# Altium PCB PCB8.PcbDoc
Units mil, origin at the board's own origin, x right, y up, seen from the top; angles counter-clockwise.
Board outline 6000 x 4000 mil, 2 copper layers (Top Layer, Bottom Layer); 13 components, 16 nets, 86 pads, 11 vias.
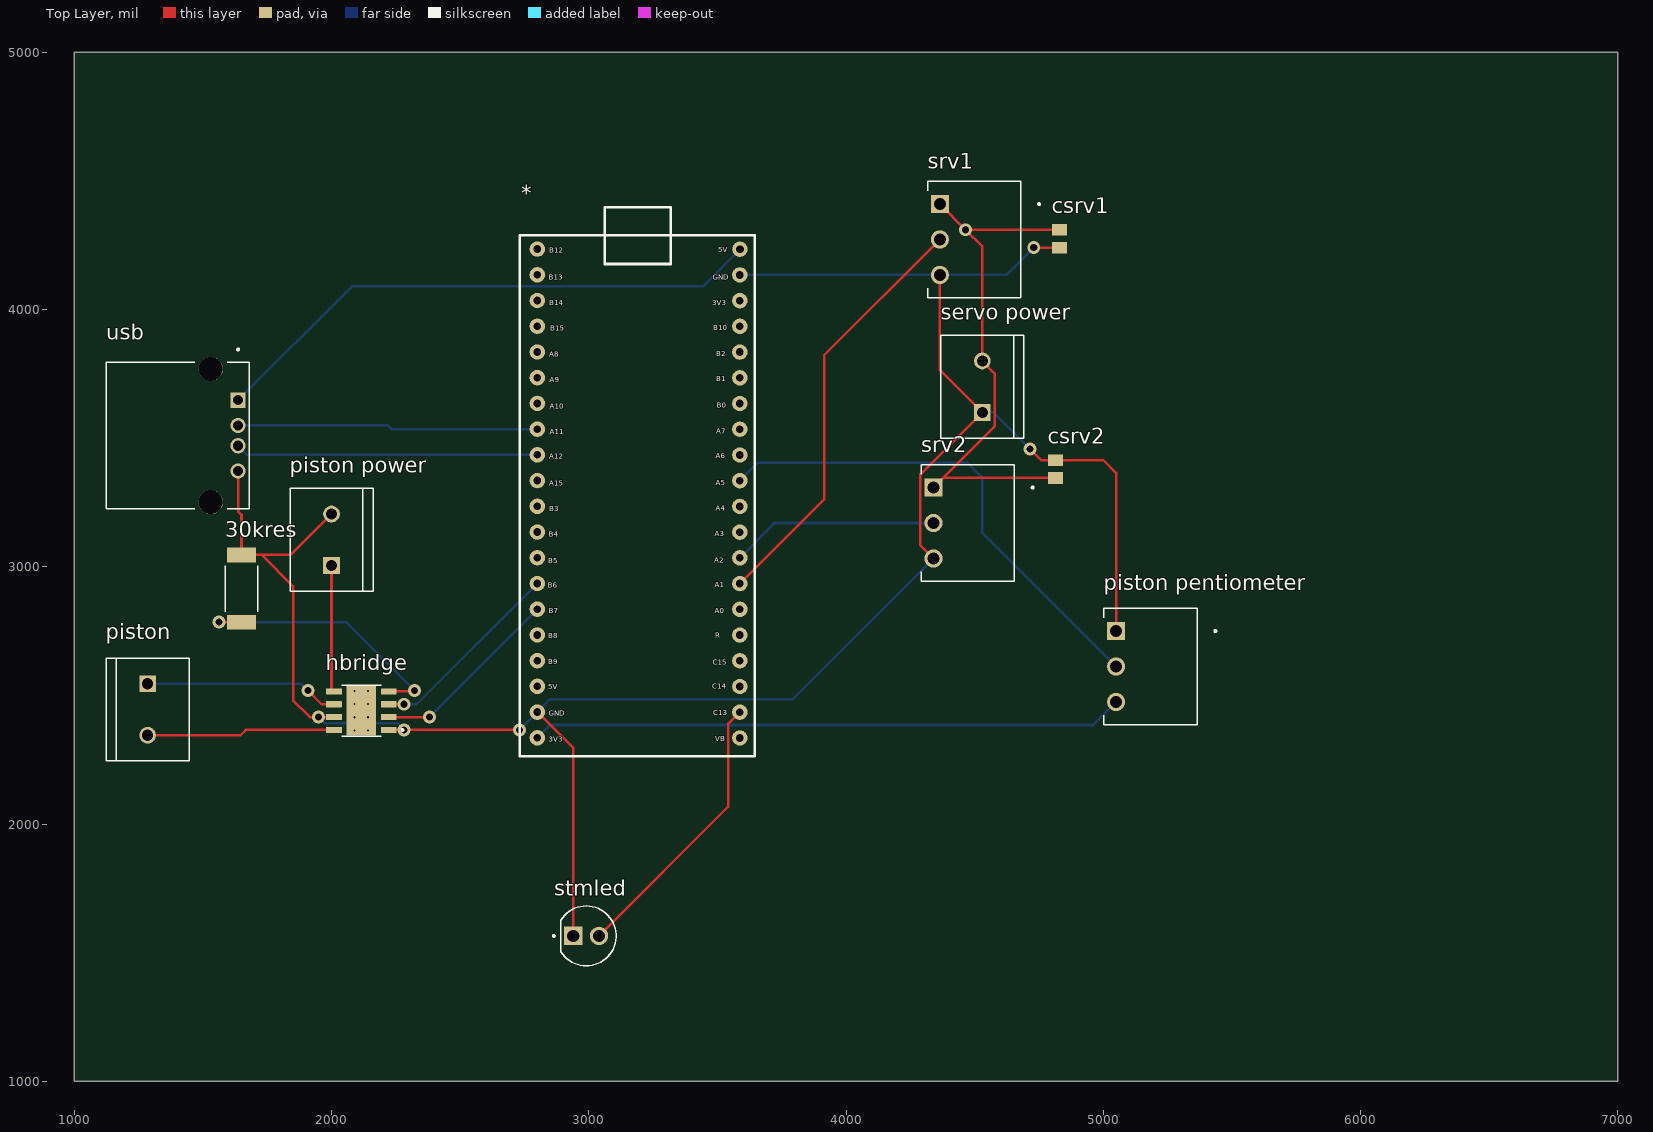
[diagram p0: Top Layer view]
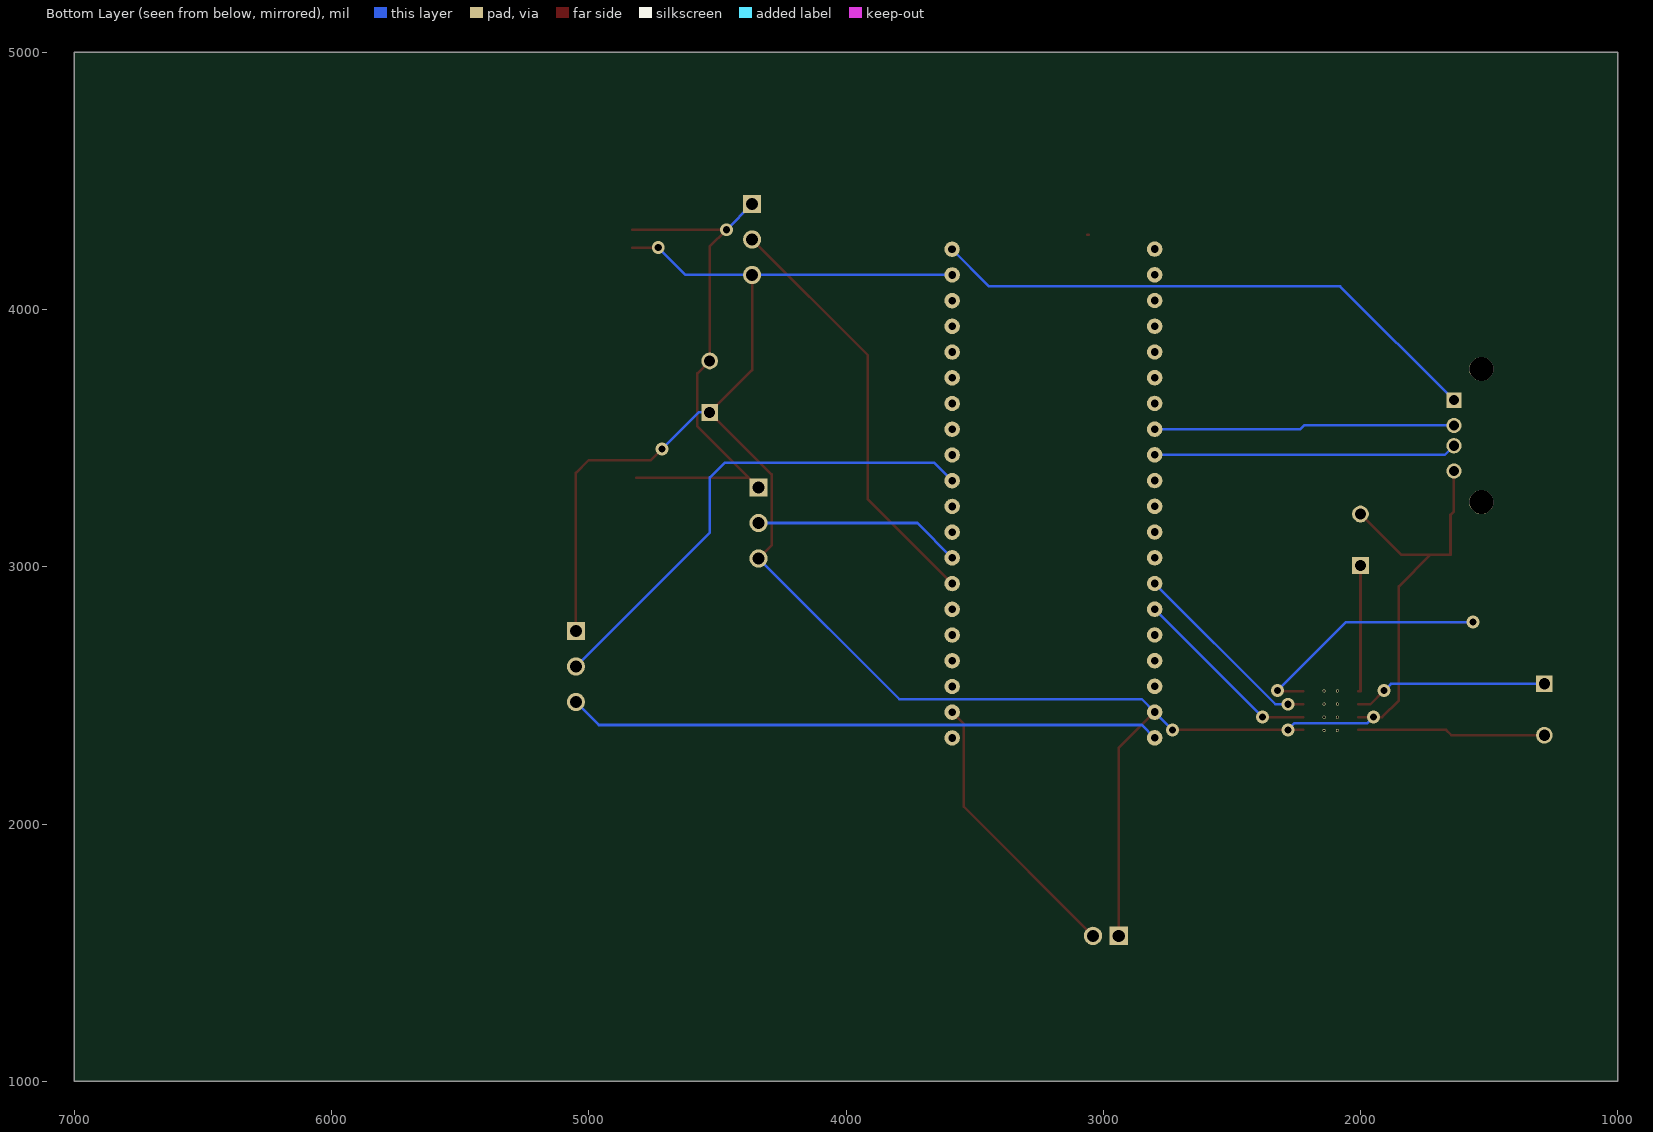
[diagram p1: Bottom Layer view, seen from below]
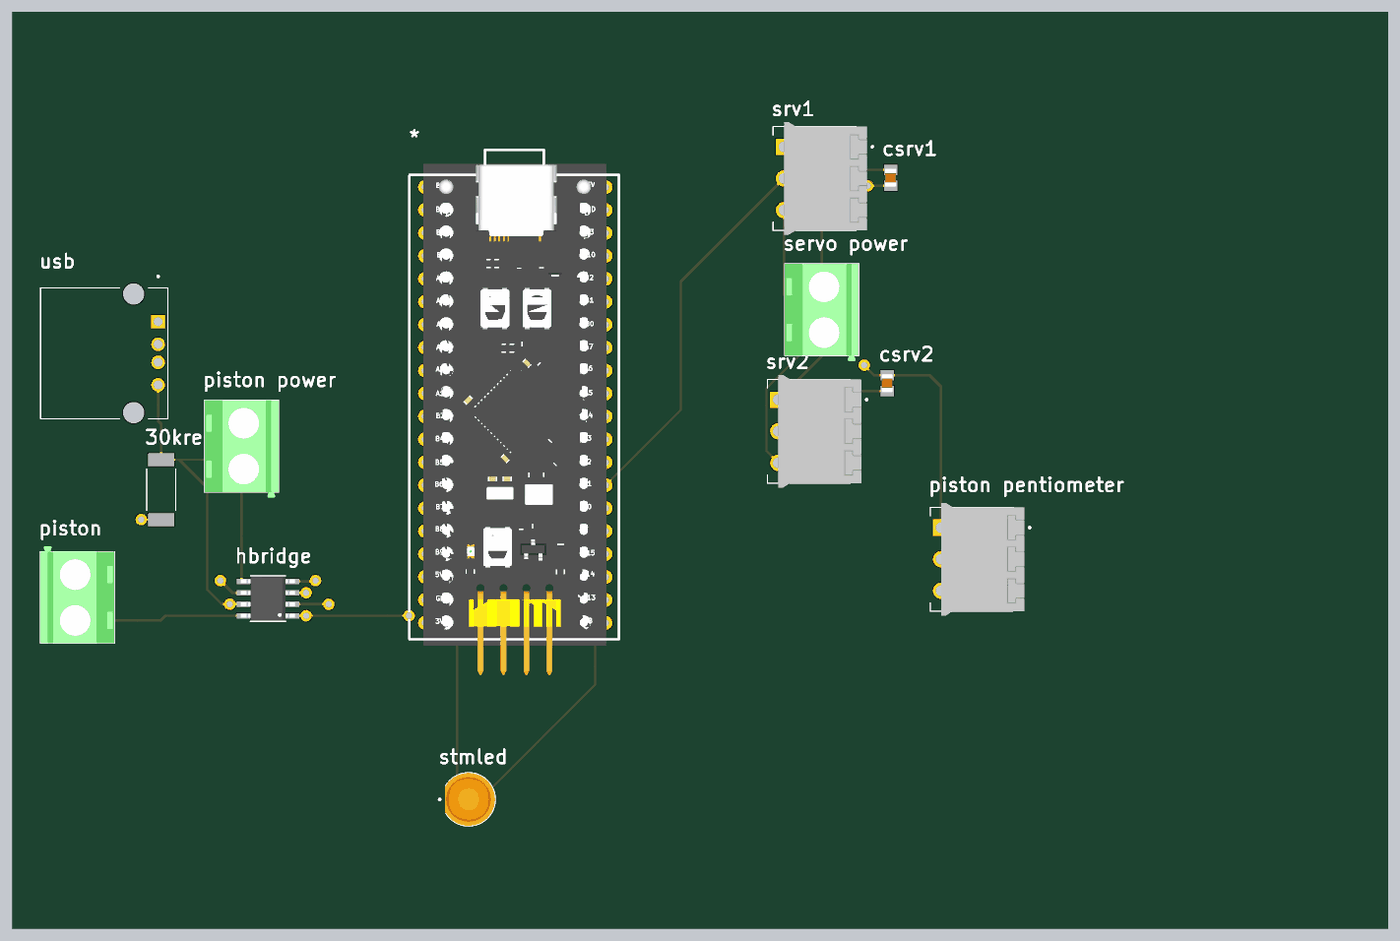
[diagram p2: 3D render of the assembled board from above, using the file's embedded part models]

## Layer stack, top to bottom
Top Solder: solder mask 0.4, Solder Resist, Dk 3.5
Top Layer: signal copper 1.4
Dielectric 1: dielectric 12.6, FR-4, Dk 4.8
Bottom Layer: signal copper 1.4
Bottom Solder: solder mask 0.4, Solder Resist, Dk 3.5

## Board outline
1000,1000 7000,1000 7000,5000 1000,5000

## Design rules (kind name [scope] priority, off if disabled: settings)
Clearance [All] p1: gap=10 ignorepadtopadclearanceinfootprint=FALSE
PolygonConnect [All] p1: connectstyle=Relief reliefconductorwidth=10 reliefentries=4 polygonreliefangle="90 Angle" airgapwidth=10
RoutingVias [All] p1: holewidth=28 width=50 viastyle="Through Hole" minholewidth=28 minwidth=50 maxholewidth=28 maxwidth=50
SolderMaskExpansion [All] p1: expansion=4 istentingtop=FALSE
SupplyNets "Schematic Supply Nets" [InNet('GND')] p1: voltage=0.000
Width [All] p1: maxlimit=10 minlimit=10 preferedwidth=10
30 further rules are at their usual default settings.

## Components (designator, comment, footprint, x,y, rotation, side; value= is the part's Value field where it differs from the comment)
30kres "ERJU1TF3002U" RES_ERJU1TF3002U 1650,2915 r270 top
* "STM32 BLACK PILL" "STM 32 Black Pill" 2800.28,4234.38 r0 top
csrv1 "CGA4J1X7S1E106K125AE" CAPC2012X150N 4830,4275.35 r270 top
csrv2 "CGA4J1X7S1E106K125AE" CAPC2012X150N 4815,3380 r90 top
hbridge "DRV8871DDA" VREG_LM5017MR/NOPB 2115.59,2440.59 r180 top
piston "282837-2" TE_282837-2 1285,2445 r270 top
"piston pentiometer" "284512-3" TE_284512-3 5050,2612.2 r270 top
"piston power" "282837-2" TE_282837-2 2000,3105 r90 top
"servo power" "282837-2" TE_282837-2 4530,3700 r90 top
srv1 "284512-3" TE_284512-3 4365,4272.2 r270 top
srv2 "284512-3" TE_284512-3 4340,3170 r270 top
stmled "L08R5000Q1" LEDRD254W57D500H1070 2990,1565 r0 top
usb "USB-A1HSW6" OST_USB-A1HSW6 1530,3510 r270 top

## Footprints (in the part's own frame and the unit in brackets; to place one, negate y for a bottom-side part, rotate by r counter-clockwise, add the part's x,y. Pads: shape width x height; smd on the part's side, far side on the other; paste and mask are expansions set on the pad)
CAPC2012X150N [mm]
  rect 1.15x1.47 smd: 1(-0.88,0) 2(0.88,0)
  body extent -1,-0.63 1,0.63, height 1.5
LEDRD254W57D500H1070 [mm]
  round 1.815 hole 1.21: A(1.27,0)
  rect 1.815x1.815 / inner round 1.815 / far side rect 1.815x1.815 hole 1.21: C(-1.27,0)
  silkscreen extent -3.3,-2.96 2.96,2.96, body extent -2.6,-2.95 2.95,2.95, height 9.1
OST_USB-A1HSW6 [mm]
  rect 1.508x1.508 / inner round 1.508 / far side rect 1.508x1.508 hole 1: 1(-3.5,2.71)
  round 1.508 hole 1: 2(-1,2.71) 3(1,2.71) 4(3.5,2.71)
  round 2.38 hole 2.38 unplated: ""(-6.57,0) ""(6.57,0)
  silkscreen extent -8.61,-10.3 7.25,3.8
RES_ERJU1TF3002U [mm]
  rect 1.45x2.9 smd: 1(-3.325,0) 2(3.325,0)
  silkscreen extent -2.28,-1.6 2.28,1.6
"STM 32 Black Pill" [mil]
  round 60 hole 30: 1(787.4,0) 2(787.2,-99.8) 3(787.2,-199.8) 4(787.2,-299.8) 5(787.2,-399.8) 6(787.2,-499.8) 7(787.2,-599.8) 8(787.2,-699.8) 9(787.2,-799.8) 10(787.2,-899.8) 11(787.2,-999.8) 12(787.2,-1099.8) 13(787.2,-1199.8) 14(787.2,-1299.8) 15(787.2,-1399.8) 16(787.2,-1499.8) 17(787.2,-1599.8) 18(787.2,-1699.8) 19(787.2,-1799.8) 20(787.2,-1899.8) 21(-0.28,0.62) 22(-0.28,-99.38) 23(-0.28,-199.38) 24(-0.28,-299.38) 25(-0.28,-399.38) 26(-0.28,-499.38) 27(-0.28,-599.38) 28(-0.28,-699.38) 29(-0.28,-799.38) 30(-0.28,-899.38) 31(-0.28,-999.38) 32(-0.28,-1099.38) 33(-0.28,-1199.38) 34(-0.28,-1299.38) 35(-0.28,-1399.38) 36(-0.28,-1499.38) 37(-0.28,-1599.38) 38(-0.28,-1699.38) 39(-0.28,-1799.38) 40(-0.28,-1899.38)
  Top Layer lines w10: 255.44,55.62 261.44,55.62
  silkscreen extent -68,-1971 845,163, body extent -8,-2128 792,102, height 124
TE_282837-2 [mm]
  rect 1.65x1.65 / inner round 1.65 / far side rect 1.65x1.65 hole 1.1: 1(-2.54,0)
  round 1.65 hole 1.1: 2(2.54,0)
  silkscreen extent -5.08,-4.1 5.08,4.1, body extent -5.68,-4.1 5.08,4.1, height 10
TE_284512-3 [mm]
  rect 1.8x1.8 / inner round 1.8 / far side rect 1.8x1.8 hole 1.2: 1(-3.5,0)
  round 1.8 hole 1.2: 2(0,0) 3(3.5,0)
  silkscreen extent -5.75,-1.2 5.75,9.9, body extent -6.25,0 6.25,9.2, height 4.25
VREG_LM5017MR/NOPB [mm]
  rrect5% 1.55x0.6 smd mask+0: 1(-2.7,1.905) 2(-2.7,0.635) 3(-2.7,-0.635) 4(-2.7,-1.905) 5(2.7,-1.905) 6(2.7,-0.635) 7(2.7,0.635) 8(2.7,1.905)
  rect 2.95x4.9 smd paste-3 mask+0: 9(0,0)
  round 0.3 hole 0.2: 10(-0.65,1.95) 11(0.65,1.95) 12(-0.65,0.65) 13(0.65,0.65) 14(-0.65,-0.65) 15(0.65,-0.65) 16(-0.65,-1.95) 17(0.65,-1.95)
  silkscreen extent -4.17,-2.52 1.95,2.52, body extent -3,-2.45 3,2.45, height 1.7

## Part data
30kres usb: Package=None, Availability=Unavailable, Price=None
  30kres: MP=ERJU1TF3002U
  usb: MF="{'manufacturer': u'On Shore Technology Inc.'}", MP=USB-A1HSW6
*: library part CMP-004-000000-1, Design Item ID="STM32 BLACK PILL", Source="STM 32 Balck Pill.SchLib"
csrv1 csrv2: "10 ÂµF Â±10% 25V Ceramic Capacitor X7S 0805 (2012 Metric)", Package="2012 TDK", Check_prices=https://www.snapeda.com/parts/CGA4J1X7S1E106K125AE/TDK/view-part/?ref=eda, Digi-Key_Part_Number=445-181411-2-ND, MF=TDK, MP=CGA4J1X7S1E106K125AE, Purchase-URL=https://pricing.snapeda.com/search/part/CGA4J1X7S1E106K125AE/?ref=eda, SnapEDA_Link=https://www.snapeda.com/parts/CGA4J1X7S1E106K125AE/TDK/view-part/?ref=snap
hbridge: "50-V, 3.6-A H-bridge motor driver with integrated current sensing", Package="HSOIC-8 Texas Instruments", Check_prices=https://www.snapeda.com/parts/DRV8871DDA/Texas+Instruments/view-part/?ref=eda, MF="Texas Instruments", MP=DRV8871DDA, SnapEDA_Link=https://www.snapeda.com/parts/DRV8871DDA/Texas+Instruments/view-part/?ref=snap
piston "piston power" "servo power": "Ð Ð°Ð·ÑŠÐµÐ¼Ð½Ñ‹Ðµ ÐºÐ»ÐµÐ¼Ð¼Ð½Ñ‹Ðµ ÐºÐ¾Ð»Ð¾Ð´ÐºÐ¸ Ð Ð¾Ð·ÐµÑ‚ÐºÐ° 2 Ð¿Ð¾Ð»Ð¾Ð¶ÐµÐ½Ð¸Ñ 5,08 Ð¼Ð¼ ÐŸÑ€Ð¸Ð¿Ð¾Ð¹ Ð¿Ñ€ÑÐ¼Ð¾Ð¹ Ñ‡ÐµÑ€ÐµÐ· Ð¾Ñ‚Ð²ÐµÑ€ÑÑ‚Ð¸Ðµ 13,5 Ð / ÐºÐ¾Ð½Ñ‚Ð°ÐºÑ‚", Package=None, Availability="In Stock", Check_prices=https://www.snapeda.com/parts/282837-2/TE+Connectivity+AMP+Connectors/view-part/?ref=eda, MF="TE Connectivity", MP=282837-2, Price=None, Purchase-URL=https://pricing.snapeda.com/search/part/282837-2/?ref=eda, SnapEDA_Link=https://www.snapeda.com/parts/282837-2/TE+Connectivity+AMP+Connectors/view-part/?ref=snap
"piston pentiometer" srv1 srv2: "3 Position Terminal Block Header, Male Pins, Shrouded (4 Side) 0.138 (3.50mm) 90Â°, Right Angle Through Hole", Package=None, Centerline_Pitch="3.5 mm[.138 in]", Check_prices=https://www.snapeda.com/parts/284512-3/TE+Connectivity+AMP+Connectors/view-part/?ref=eda, EU_RoHS_Compliance=Compliant, MF="TE Connectivity", MP=284512-3, Number_of_Positions=3, SnapEDA_Link=https://www.snapeda.com/parts/284512-3/TE+Connectivity+AMP+Connectors/view-part/?ref=snap
stmled: "LED, 5MM, ORANGE; LED / Lamp Size: 5mm / T-1 3/4; LED Colour: Orange; Typ Luminous Intensity: 4.3mcd; Viewing Angle: ...", Package=None, Availability="In Stock", Check_prices=https://www.snapeda.com/parts/L08R5000Q1/LED+Technology/view-part/?ref=eda, MF="LED Technology", MP=L08R5000Q1, Price=None, SnapEDA_Link=https://www.snapeda.com/parts/L08R5000Q1/LED+Technology/view-part/?ref=snap

## Via types
v1: diameter 50, hole 28, Top Layer to Bottom Layer, 11 vias

## Nets (pads, with @x,y where several pads share a name; then routed paths per layer and width w, separated by ;. In a path a pad name is that pad's centre, name@x,y a point inside that pad or via, vN(x,y) a via of type N, cw(c..) or ccw(c..) an arc to the next point about the centre after c; other vN are vias at no path point)
_N: *.28 usb.2 | length 1169.3
  Bottom Layer w10: usb.2 2219,3549.37 2233.37,3535 *.28
_P: *.29 usb.3 | length 1178.1
  Bottom Layer w10: usb.3 1672.32,3435 *.29
GND: 30kres.1 "piston pentiometer.1" "piston power.2" "servo power.1" *.2 *.39 csrv1.2 csrv2.2 hbridge.1 hbridge.7 srv1.3 srv2.3 stmled.C usb.4 | length 9036
  Top Layer w10: usb.4 1636.69,3215.31 1650,3202 30kres.1 1729,3045.91 ; v1(1949,2416) v1@1949.41,2415.59 ; 2000,3205 1840.91,3045.91 1729,3045.91 ; hbridge.7 v1@1949.41,2415.59 ; hbridge.1 v1(2282,2365.59) v1(2730.59,2365.59) ; *.39 2940,2295 stmled.C ; srv2.3 4289,3083.2 4289,3359 4530,3600 4365,3765 srv1.3 ; v1(4715,3458) 4758.35,3414.65 csrv2.2 5000,3414.65 5050,3364.65 5050,2750 ; v1(4730,4240.71) csrv1.2 ; 1729,3045.91 1851,2923.91 1851,2480 1915.41,2415.59 v1@1949.41,2415.59
  Bottom Layer w10: v1(1949,2416) 1973,2392 2255.59,2392 v1(2282,2365.59) ; v1(2730.59,2365.59) *.39 2850,2485 3792.8,2485 srv2.3 ; *.2 3976,4134.57 3976.16,4134.41 srv1.3 4623.7,4134.41 v1(4730,4240.71) ; 4530,3600 4573,3600 v1(4715,3458)
Net30kres_2: 30kres.2 hbridge.4 | length 1060.1
  Top Layer w10: v1(1563,2785) 1563.91,2784.09 30kres.2 ; hbridge.4 2319.59,2515.59 v1(2323,2519)
  Bottom Layer w10: v1(1563,2785) 2057,2785 v1(2323,2519)
Net*_1: *.1 usb.1 | length 2194
  Bottom Layer w10: usb.1 2078.9,4090 3443.31,4090 *.1
Net*_10: "piston pentiometer.2" *.10 | length 1945.3
  Bottom Layer w10: *.10 3657.91,3405 4471,3405 4529,3347 4529,3133.2 5050,2612.2
Net*_13: *.13 srv2.2 | length 808.6
  Bottom Layer w10: *.13 3722.91,3170 srv2.2
Net*_14: *.14 srv1.2 | length 1659.7
  Top Layer w10: *.14 3915,3262.09 3915,3822.2 srv1.2
Net*_19: *.19 stmled.A | length 1096.4
  Top Layer w10: stmled.A 3542,2067 3542,2389.09 *.19
Net*_34: *.34 hbridge.3 | length 772.5
  Top Layer w10: hbridge.3 v1(2282,2465.59)
  Bottom Layer w10: v1(2282,2465.59) 2330.59,2465.59 *.34
Net*_35: *.35 hbridge.2 | length 751.8
  Top Layer w10: hbridge.2 v1(2380.59,2415.59)
  Bottom Layer w10: v1(2380.59,2415.59) *.35
Net*_40: "piston pentiometer.3" *.40 | length 2307.7
  Bottom Layer w10: *.40 2850,2385 4960.59,2385 5050,2474.41
Netcsrv1_1: "servo power.2" csrv1.1 csrv2.1 srv1.1 srv2.1 | length 2232.9
  Top Layer w10: srv2.1 4377.56,3345.35 ; srv1.1 v1(4465,4310) ; csrv2.1 4377.56,3345.35 ; csrv1.1 v1(4465,4310) ; 4377.56,3345.35 4578,3545.8 4578,3752 4530,3800 4530,4245 v1(4465,4310)
  Bottom Layer w10: srv1.1 v1(4465,4310)
Nethbridge_5: "piston power.1" hbridge.5 | length 498.7
  Top Layer w10: 2000,3005 2000,2515.59 hbridge.5
Nethbridge_6: hbridge.6 piston.1 | length 757.2
  Top Layer w10: v1(1908,2519) 1961.41,2465.59 hbridge.6
  Bottom Layer w10: piston.1 1882,2545 v1(1908,2519)
Nethbridge_8: hbridge.8 piston.2 | length 732.8
  Top Layer w10: piston.2 1647,2345 1667.59,2365.59 hbridge.8
pads on no net: *.3 *.4 *.5 *.6 *.7 *.8 *.9 *.11 *.12 *.15 *.16 *.17 *.18 *.20 *.21 *.22 *.23 *.24 *.25 *.26 *.27 *.30 *.31 *.32 *.33 *.36 *.37 *.38 hbridge.9 hbridge.10 hbridge.11 hbridge.12 hbridge.13 hbridge.14 hbridge.15 hbridge.16 hbridge.17 usb.

## Text inside footprints (layer, text, board x,y; h text height)
*: Top Overlay "3V3" at 2844,2320 h20; Top Overlay "GND" at 2845,2420 h20; Top Overlay "B8" at 2843,2722 h20; Top Overlay "B7" at 2845,2819 h20; Top Overlay "B6" at 2841,2918 h20; Top Overlay "B4" at 2844,3116 h20; Top Overlay "B5" at 2843,3013 h20; Top Overlay "5V" at 2843,2524 h20; Top Overlay "B9" at 2843,2622 h20; Top Overlay "A12" at 2846,3420 h20; Top Overlay "A11" at 2848,3515 h20; Top Overlay "B3" at 2846,3216 h20; Top Overlay "A10" at 2849,3615 h20; Top Overlay "A9" at 2848,3718 h20; Top Overlay "A8" at 2847,3816 h20; Top Overlay "B15" at 2850,3918 h20; Top Overlay "A15" at 2846,3314 h20; Top Overlay "B14" at 2847,4016 h20; Top Overlay "B13" at 2845,4116 h20; Top Overlay "B12" at 2846,4220 h20; Top Overlay "5V" at 3503.04,4223.55 h20; Top Overlay "B0" at 3496.97,3617.57 h20; Top Overlay "B2" at 3494.97,3818.57 h20; Top Overlay "B1" at 3495.97,3720.57 h20; Top Overlay "A6" at 3493.97,3422.57 h20; Top Overlay "A4" at 3493.97,3218.57 h20; Top Overlay "A5" at 3493.97,3316.57 h20; Top Overlay "A7" at 3495.97,3517.57 h20; Top Overlay "VB" at 3491.97,2322.57 h20; Top Overlay "R" at 3490.97,2724.57 h20; Top Overlay "A2" at 3487.97,3015.57 h20; Top Overlay "A3" at 3488.97,3118.57 h20; Top Overlay "A0" at 3488.97,2819.57 h20; Top Overlay "A1" at 3488.97,2920.57 h20; Top Overlay "C14" at 3480.97,2526.57 h20; Top Overlay "C15" at 3481.97,2618.57 h20; Top Overlay "C13" at 3483.97,2423.57 h20; Top Overlay "B10" at 3483.97,3918.57 h20; Top Overlay "3V3" at 3480.97,4017.57 h20; Top Overlay "GND" at 3481.97,4116.57 h20